# Altium PCB E17-02-003.PcbDoc
Units mil, origin at the board's own origin, x right, y up, seen from the top; angles counter-clockwise.
Board outline 5413.39 x 3530 mil, 2 copper layers (Top Layer, Bottom Layer); 74 components, 64 nets, 364 pads, 0 vias.
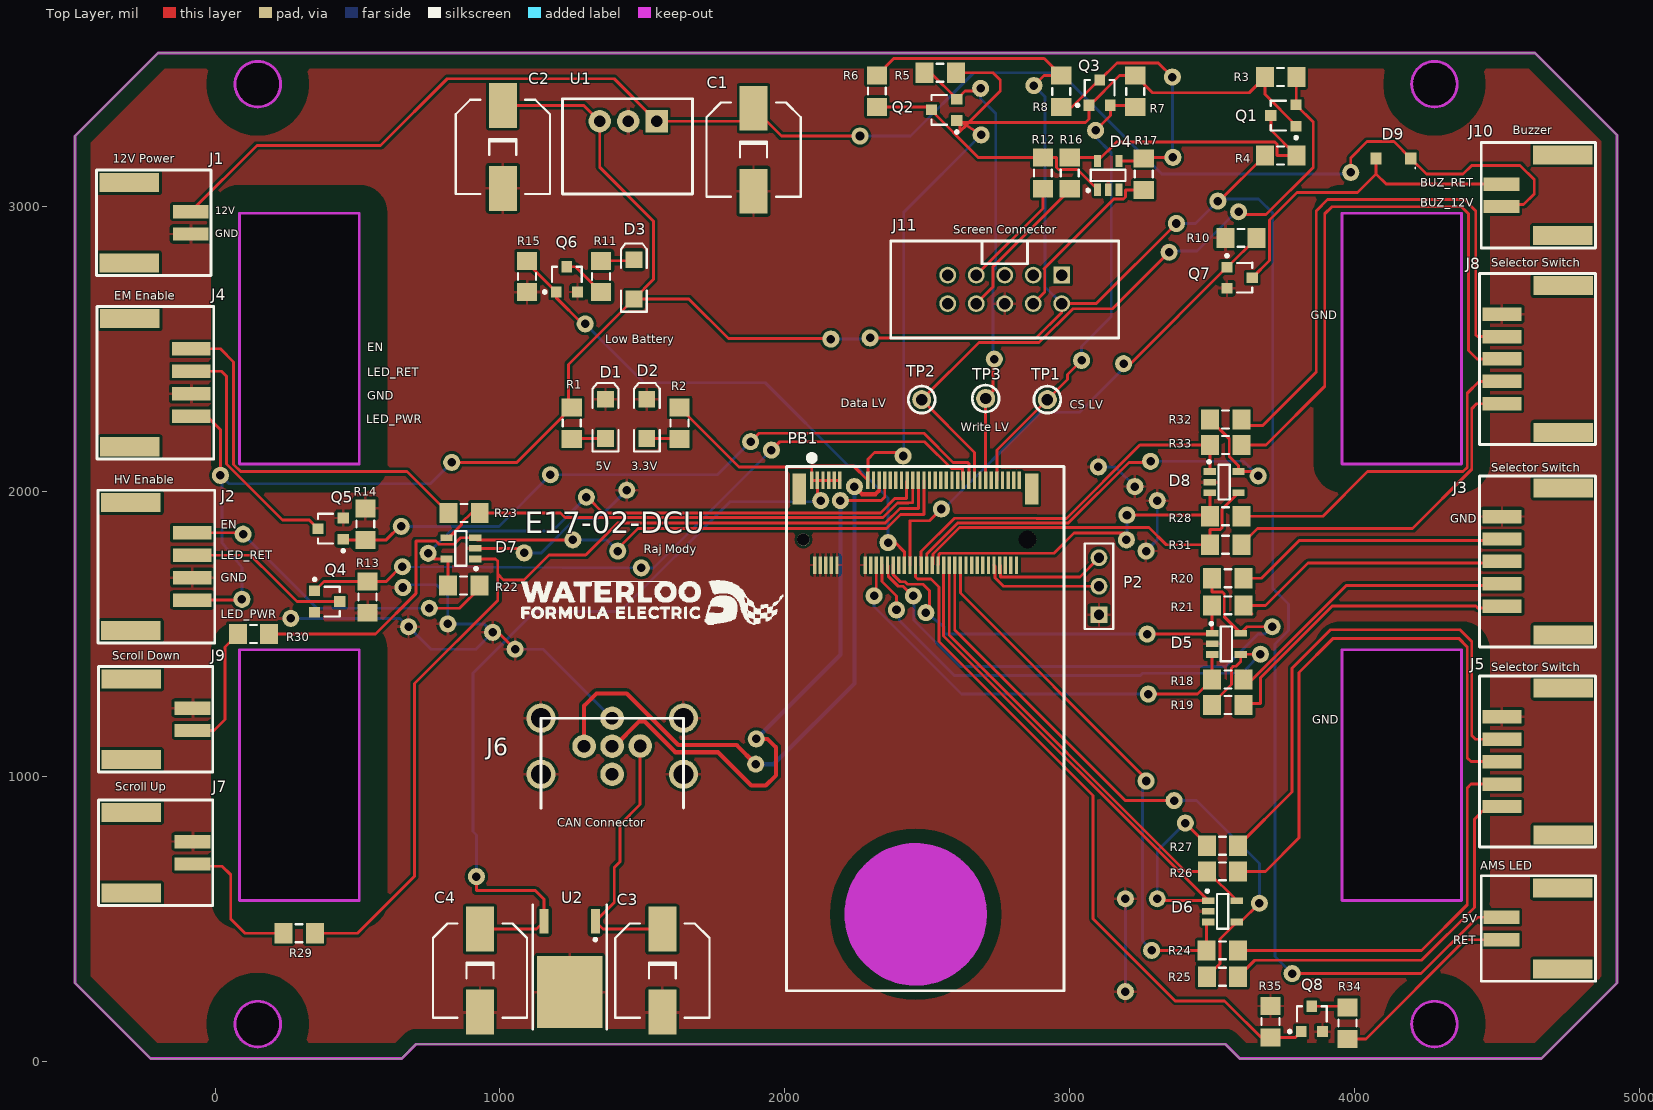
[diagram p0: Top Layer view]
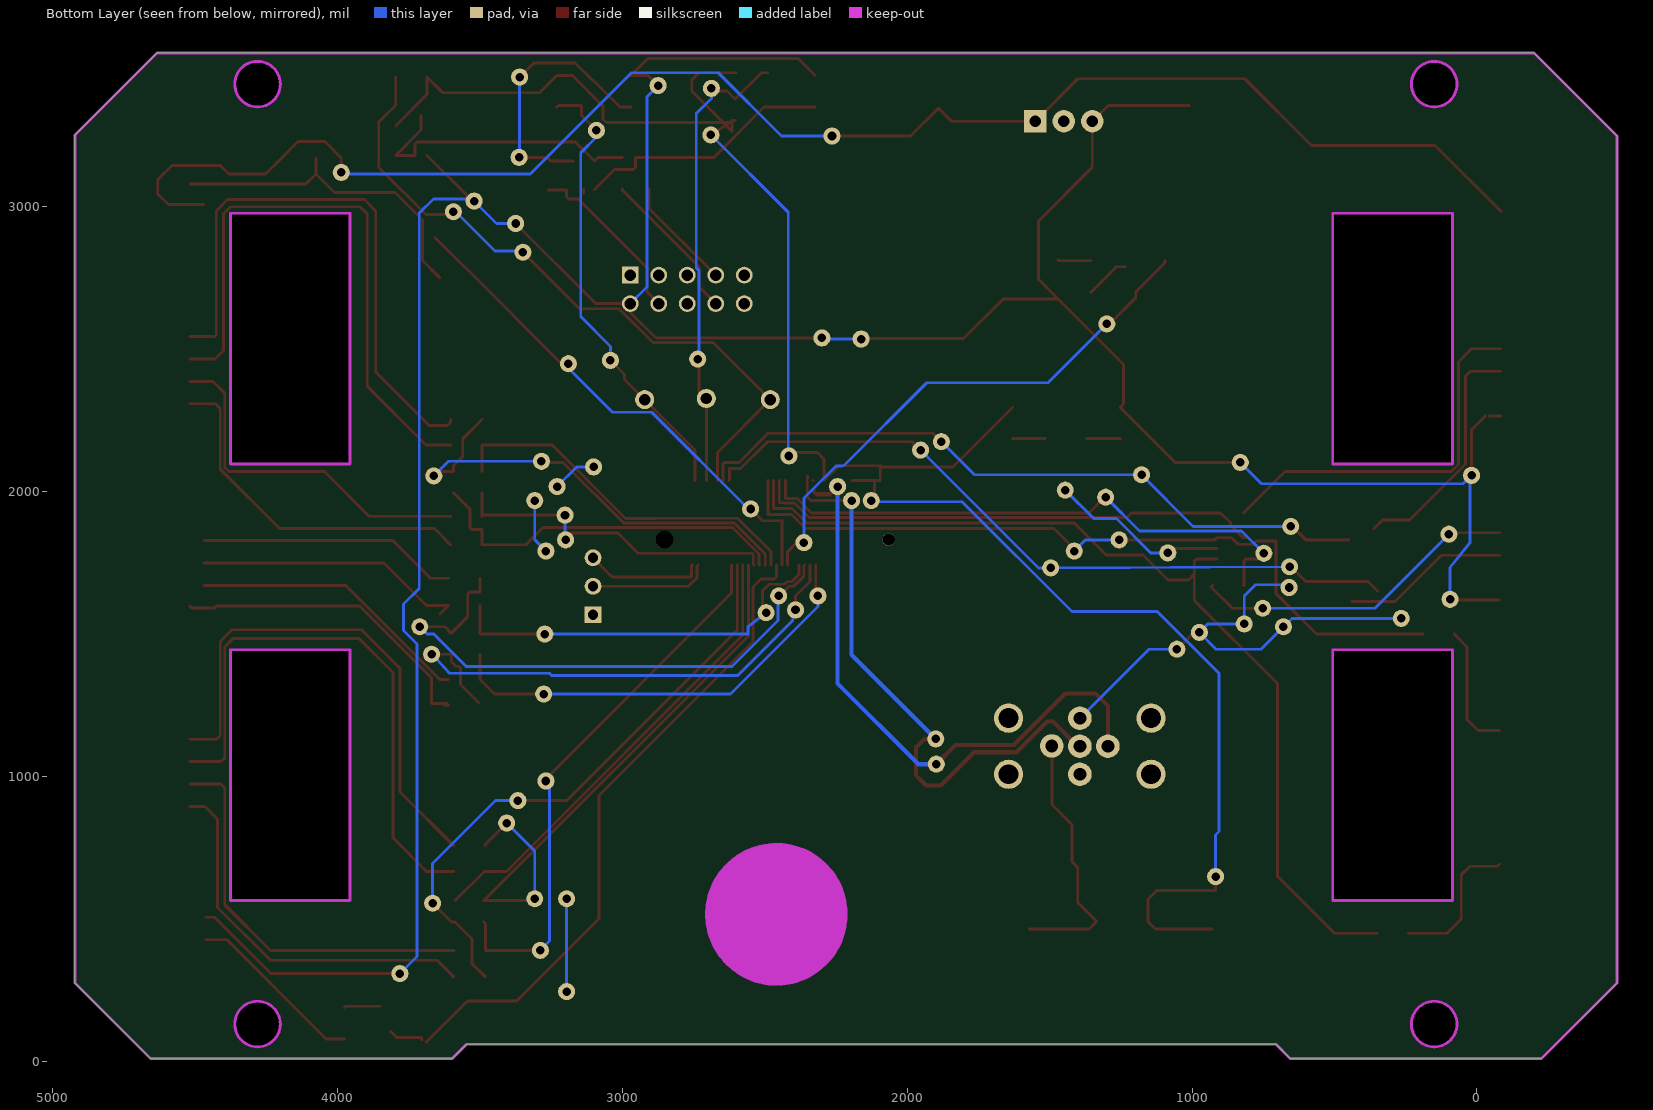
[diagram p1: Bottom Layer view, seen from below]
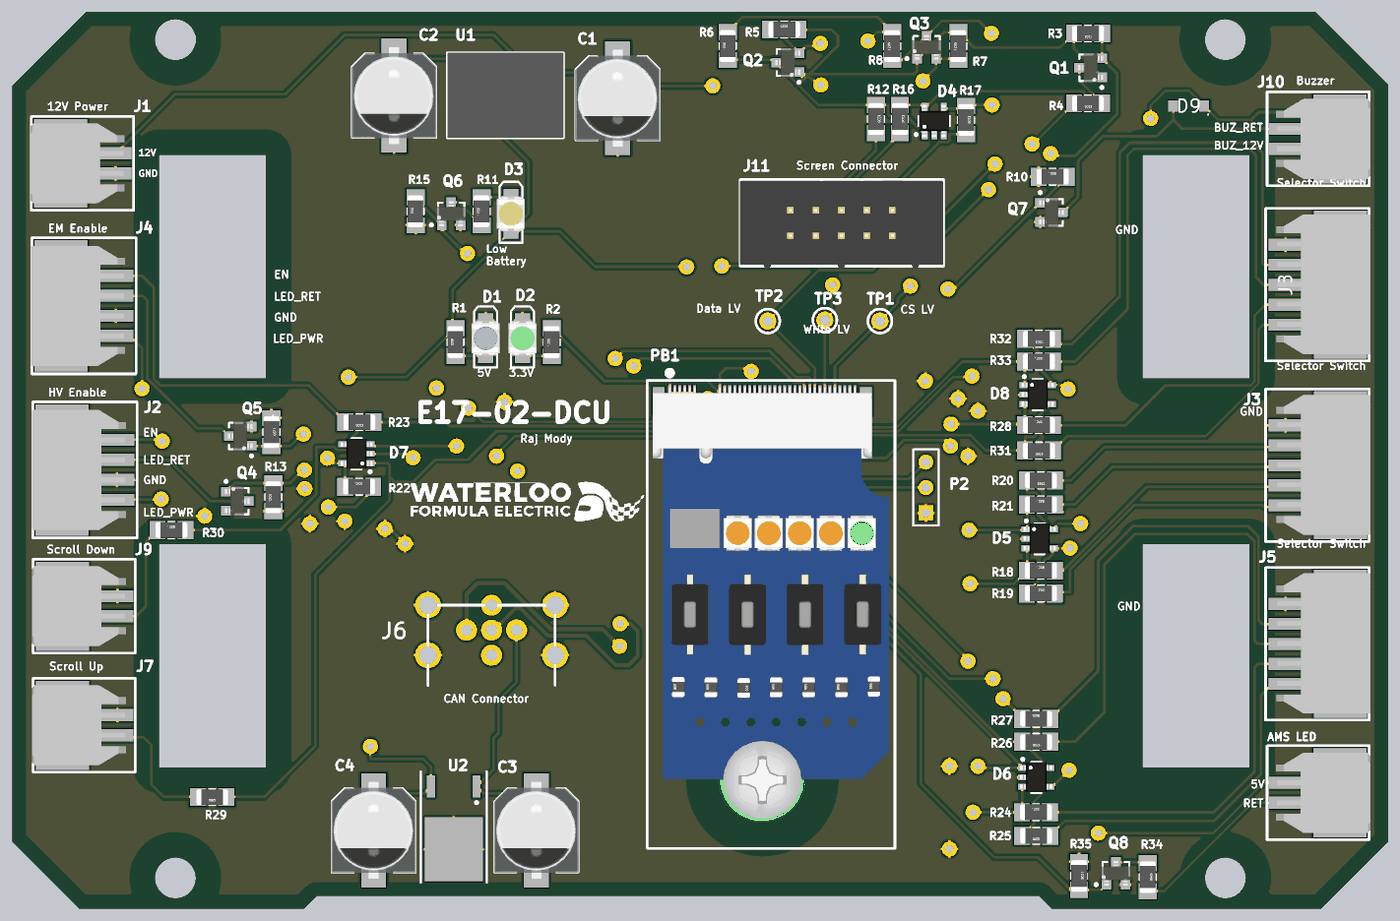
[diagram p2: 3D render of the assembled board from above, using the file's embedded part models]

## Layer stack, top to bottom
Top Solder: solder mask 0.4, Solder Resist, Dk 3.5
Top Layer: signal copper 1.4
Dielectric 1: dielectric 12.6, FR-4, Dk 4.8
Bottom Layer: signal copper 1.4
Bottom Solder: solder mask 0.4, Solder Resist, Dk 3.5

## Board outline
-226.54,10 -492.13,275.59 -492.13,3248.03 -200.16,3540 4633.23,3540 4921.26,3251.97 4921.26,275.59 4655.67,10 3596.3,10 3546.3,60 705.67,60 655.67,10
cut-out: 3955,565 3955,1445 4375,1445 4375,565
cut-out: 3955,2097 3955,2977 4375,2977 4375,2097
cut-out: 86,565 86,1445 506,1445 506,565
cut-out: 86,2097 86,2977 506,2977 506,2097
cut-out: 70,131 ccw(c150,131) 150,51 ccw(c150,131) 230,131 ccw(c150,131) 150,211 ccw(c150,131)
cut-out: 150,3350 cw(c150,3430) 70,3430 cw(c150,3430) 150,3510 cw(c150,3430) 230,3430 cw(c150,3430)
cut-out: 4200,3430 ccw(c4280,3430) 4280,3350 ccw(c4280,3430) 4360,3430 ccw(c4280,3430) 4280,3510 ccw(c4280,3430)
cut-out: 4200,131 ccw(c4280,131) 4280,51 ccw(c4280,131) 4360,131 ccw(c4280,131) 4280,211 ccw(c4280,131)

## Design rules (kind name [scope] priority, off if disabled: settings)
BoardOutlineClearance [InPolygon] p1: gap=10 ignorepadtopadclearanceinfootprint=FALSE except(0: Arc-SplitContinuation Track-SplitContinuation SMDPad-SplitContinuation THPad-SplitContinuation Via-SplitContinuation Fill-SplitContinuation Poly-SplitContinuation Region-SplitContinuation Text-SplitContinuation; 100: Poly-OutlineEdge Poly-CavityEdge Poly-CutoutEdge Poly-SplitBarrior)
Clearance Clearance_3 [InPolygon vs OnLayer('Top Layer')] p1: gap=10 ignorepadtopadclearanceinfootprint=FALSE
Clearance Clearance_4 [InPolygon vs IsPad] p2: gap=10 ignorepadtopadclearanceinfootprint=FALSE
Clearance Clearance_5 [OnLayer('Top Layer') vs IsPad] p3: gap=6 ignorepadtopadclearanceinfootprint=FALSE
Clearance Clearance_6 [OnLayer('Bottom Layer') vs IsPad] p4: gap=6 ignorepadtopadclearanceinfootprint=FALSE
Clearance Clearance_2 [OnLayer('Bottom Layer') vs OnLayer('Bottom Layer')] p5: gap=6 ignorepadtopadclearanceinfootprint=FALSE
Clearance Clearance_1 [InPolygon vs OnLayer('Keep-Out Layer')] p6: gap=50 ignorepadtopadclearanceinfootprint=FALSE
Clearance [OnLayer('Top Layer') vs OnLayer('Top Layer')] p7: gap=6 ignorepadtopadclearanceinfootprint=FALSE
DiffPairsRouting [All] p1: maxlimit=10 minlimit=10 mostfreqgap=10 toplayer_minwidth=15 toplayer_maxwidth=15 toplayer_prefwidth=15 bottomlayer_minwidth=15 bottomlayer_maxwidth=15 bottomlayer_prefwidth=15 maxuncoupledlength=500
PlaneClearance [All] p1: clearance=40
PolygonConnect [All] p1: connectstyle=Relief reliefconductorwidth=10 reliefentries=4 polygonreliefangle="90 Angle" airgapwidth=10
RoutingVias [All] p1: holewidth=28 width=50 viastyle="Through Hole" minholewidth=28 minwidth=50 maxholewidth=28 maxwidth=50
SolderMaskExpansion [All] p1: expansion=4
Width [All] p1: maxlimit=10 minlimit=1 preferedwidth=10
28 further rules are at their usual default settings.

## Classes and differential pairs
component class E16-02-001: C1 C2 C3 C4 D1 D2 D9 J10 PB1 Q1 Q2 Q3 Q7 R1 R2 R3 R4 R5 R6 R7 R8 R10 TP1 TP2 TP3 U1 U2
component class E16-02-002: "AMS LED" D3 D4 D5 D6 D7 D8 J1 J2 J3 J4 J5 J6 J7 J8 J9 J11 P2 Q4 Q5 Q6 Q8 R11 R12 R13 R14 R15 R16 R17 R18 R19 R20 R21 R22 R23 R24 R25 R26 R27 R28 R29 R30 R31 R32 R33 R34 R35
differential pair CAN: +CAN_P -CAN_N

## Components (designator, comment, footprint, x,y, rotation, side; value= is the part's Value field where it differs from the comment)
"AMS LED" "J_5023520200" MOLEX_DURACLIK_2 4515,466.54 r270 top (schematic designator J12)
C1 "UWT1E470MCL1GB" UWT1E470MCL1GB 1890,3200 r270 top
C2 "UWT1E470MCL1GB" UWT1E470MCL1GB 1010,3210 r270 top
C3 "UWT1E470MCL1GB" UWT1E470MCL1GB 1569.96,318.62 r270 top
C4 "UWT1E470MCL1GB" UWT1E470MCL1GB 929.96,318.62 r270 top
D1 "OVS5MBBCR4" OVS5MBBCR4 1370.43,2254.92 r90 top
D2 "OVS5MGBCR4" OVS5MGBCR4 1515.43,2254.92 r90 top
D3 "OVS5MRBCR4" OVS5MRBCR4 1470,2745 r90 top
D4 "RCLAMP3354S.TCT" SOT95P280X145-5N 3135,3110 r90 top
D5 "RCLAMP3354S.TCT" SOT95P280X145-5N 3549.76,1465.63 r0 top
D6 "RCLAMP3354S.TCT" SOT95P280X145-5N 3536.14,526.97 r0 top
D7 "RCLAMP3354S.TCT" SOT95P280X145-5N 862.8,1800.75 r180 top
D8 "RCLAMP3354S.TCT" SOT95P280X145-5N 3541.89,2033.27 r0 top
D9 "General Purpose Diode" SODFL350X110-2N 4135.83,3169.29 r180 top
J1 "J_5023520200" MOLEX_DURACLIK_2 -85.32,2943.54 r90 top
J2 "WM7171CT-ND" MOLEX_DURACLIK_4 -79.53,1736.81 r90 top
J3 "WM7171CT-ND" MOLEX_DURACLIK_5 4516.97,1754.92 r270 top
J4 "WM7171CT-ND" MOLEX_DURACLIK_4 -83.46,2382.48 r90 top
J5 "WM7171CT-ND" MOLEX_DURACLIK_5 4516.97,1052.17 r270 top
J6 "CAN Connector (Straight)" "CAN Connector (Straight)" 1393.7,1106.3 r0 top
J7 "J_5023520200" MOLEX_DURACLIK_2 -78.74,732.28 r90 top
J8 "WM7171CT-ND" MOLEX_DURACLIK_5 4516.97,2465.55 r270 top
J9 "J_5023520200" MOLEX_DURACLIK_2 -78.74,1200.79 r90 top
J10 "J_5023520200" MOLEX_DURACLIK_2 4515,3040 r270 top
J11 "3020-10-0100-00" "IDC 10 Pos" 2971.65,2759.84 r180 top
P2 "Header 3" HDR1X3 3102.36,1567.72 r90 top
PB1 "ProcBoardRev2" PROC_BOARD 2094.49,1350.39 r0 top
Q1 "N-Channel MOSFET SOT23-3" SOT23-3 3750,3320 r90 top
Q2 "N-Channel MOSFET SOT23-3" SOT23-3 2559.29,3340 r90 top
Q3 "N-Channel MOSFET SOT23-3" SOT23-3 3105,3400 r0 top
Q4 "2N7002P,215" SOT23-3 393.7,1614.17 r270 top
Q5 "2N7002P,215" SOT23-3 405.51,1870.08 r90 top
Q6 "2N7002P,215" SOT23-3 1235,2745 r0 top
Q7 "N-Channel MOSFET SOT23-3" SOT23-3 3596.02,2750.55 r270 top
Q8 "2N7002P,215" SOT23-3 3849.65,149.17 r0 top
R1 "Res" 3216[1206] 1251.97,2240.16 r90 top
R2 "Res" 3216[1206] 1630.43,2240.04 r90 top
R3 "Res" 3216[1206] 3740,3455 r180 top
R4 "Res" 3216[1206] 3739.88,3180 r180 top
R5 "Res" 3216[1206] 2545,3470 r0 top
R6 "Res" 3216[1206] 2322.83,3405.51 r90 top
R7 "Res" 3216[1206] 3230,3405 r90 top
R8 "Res" 3216[1206] 2970,3405 r90 top
R10 "Res" 3216[1206] 3601.02,2890.55 r0 top
R11 "Res" 3216[1206] 1355,2755 r90 top
R12 "Res" 3216[1206] 2905.51,3118.11 r270 top
R13 "Res" 3216[1206] 535.43,1629.92 r90 top
R14 "Res" 3216[1206] 527.56,1885.83 r270 top
R15 "Res" 3216[1206] 1095,2755 r90 top
R16 "Res" 3216[1206] 3000,3118.11 r270 top
R17 "Res" 3216[1206] 3259.84,3114.17 r270 top
R18 "Res" 3216[1206] 3554.76,1340.63 r0 top
R19 "Res" 3216[1206] 3554.76,1250.63 r0 top
R20 "Res" 3216[1206] 3554.76,1695.63 r180 top
R21 "Res" 3216[1206] 3554.76,1600.63 r0 top
R22 "Res" 3216[1206] 872.8,1670.75 r0 top
R23 "Res" 3216[1206] 874.02,1925.2 r180 top
R24 "Res" 3216[1206] 3535.43,389.76 r0 top
R25 "Res" 3216[1206] 3536.02,296.97 r180 top
R26 "Res" 3216[1206] 3536.02,666.97 r180 top
R27 "Res" 3216[1206] 3536.02,756.97 r0 top
R28 "Res" 3216[1206] 3547.01,1913.27 r0 top
R29 "Res" 3216[1206] 295,450 r180 top
R30 "Res" 3216[1206] 135,1500 r0 top
R31 "Res" 3216[1206] 3547.01,1813.27 r180 top
R32 "Res" 3216[1206] 3546.89,2253.27 r180 top
R33 "Res" 3216[1206] 3546.89,2163.27 r0 top
R34 "Res" 3216[1206] 3974.65,134.29 r270 top
R35 "Res" 3216[1206] 3704.65,139.29 r270 top
TP1 "Test Point" "TEST POINT 5000K" 2921.26,2322.83 r0 top
TP2 "Test Point" "TEST POINT 5000K" 2480.32,2322.83 r0 top
TP3 "Test Point" "TEST POINT 5000K" 2704.72,2326.77 r0 top
U1 "R-78E5.0-1.0" R-78E5.0-1.0 1550,3300 r180 top
U2 "UA78M33CKVURG3" TO-252-3 1244.96,117.64 r180 top

## Footprints (in the part's own frame and the unit in brackets; to place one, negate y for a bottom-side part, rotate by r counter-clockwise, add the part's x,y. Pads: shape width x height; smd on the part's side, far side on the other; paste and mask are expansions set on the pad)
3216[1206] [mm] "Chip Resistor; Body 3.2 x 1.6 mm (LxW typ)"
  rect 1.6x1.8 smd: 1(-1.4,0) 2(1.4,0)
  silkscreen extent -0.3,-0.8 0.3,0.8, body extent -1.6,-0.79 1.6,0.81, height 1
"CAN Connector (Straight)" [mm] "Straight Configuration"
  round 2.1 hole 1.14: 1(0,-2.5) 2(2.5,0.025) 3(0,2.5) 4(-2.5,0) 5(0,0)
  round 2.6 hole 1.78: 6(-6.35,-2.5) 7(-6.35,2.5) 8(6.35,-2.5) 9(6.35,2.5)
  silkscreen extent -6.35,-5.52 6.35,2.5, body extent -10.28,-12.59 10.28,9.95, height 24.5
HDR1X3 [mm] "Connector; Header; 3 Position"
  rect 1.5x1.5 hole 0.9: 1(0,0)
  round 1.5 hole 0.9: 2(2.54,0) 3(5.08,0)
  silkscreen extent -1.27,-1.27 6.35,1.27
"IDC 10 Pos" [mm] "10 Position (5x2) IDC Connector"
  rect 1.5x1.5 hole 1.02: 1(0,0)
  round 1.5 hole 1.02: 2(0,2.54) 3(2.54,0) 4(2.54,2.54) 5(5.08,0) 6(5.08,2.54) 7(7.62,0) 8(7.62,2.54) 9(10.16,0) 10(10.16,2.54)
  silkscreen extent -5.08,-3.05 15.24,5.61, body extent -5.02,-2.95 15.28,5.87, height 8.89
MOLEX_DURACLIK_2 [mm] "2 Positions Header, Shrouded Connector 0.079\" (2.00mm) Surface Mount, Right Angle Tin"
  rect 1.7x5.3 smd: 0(-3.6,5.48) 0(3.6,5.48)
  rect 1.2x3.2 smd: 1(-1,0) 2(1,0)
  silkscreen extent -4.7,-1.8 4.7,8.4, body extent -4,-0.89 4,8.51, height 6.38
MOLEX_DURACLIK_4 [mm]
  rect 1.7x5.3 smd: 0(-5.715,5.48) 0(5.715,5.48)
  rect 1.2x3.45 smd: 1(-2.984,0) 2(-0.984,0) 3(1.016,0) 4(3.016,0)
  silkscreen extent -6.8,-2 6.8,8.4, body extent -6,-0.9 6,8.5, height 6.41
MOLEX_DURACLIK_5 [mm] "DuraClik™ Wire-to-Board Header, Single Row, Right Angle, 5 Circuits, Tin (Sn) Plating, Black"
  rect 1.7x5.3 smd: 0(-6.55,5.48) 0(6.55,5.48)
  rect 1.2x3.45 smd: 1(-4,0) 2(-2,0) 3(0,0) 4(2,0) 5(4,0)
  silkscreen extent -7.63,-2 7.63,8.35, body extent -7.05,-0.92 6.95,8.47, height 6.41
OVS5MBBCR4 [mm] "SMT LED; 2 Flat Leads; BLUE"
  rect 1.5x1.5 smd: 1(-1.75,0) 2(1.75,0)
  silkscreen extent -2.9,-1.15 3.2,1.15, body extent -1.75,-1.4 1.75,1.4, height 1.6
OVS5MGBCR4 [mm] "SMT LED; 2 Flat Leads; GREEN"
  rect 1.5x1.5 smd: 1(-1.75,0) 2(1.75,0)
  silkscreen extent -2.9,-1.15 3.2,1.15, body extent -1.75,-1.4 1.75,1.4, height 1.6
OVS5MRBCR4 [mm] "SMT LED; 2 Flat Leads; RED"
  rect 1.5x1.5 smd: 1(-1.75,0) 2(1.75,0)
  silkscreen extent -2.9,-1.15 3.2,1.15, body extent -1.75,-1.4 1.75,1.4, height 1.6
PROC_BOARD [mm]
  rect 1.2x2.75 smd: 0(-1.1,16.725) 0(19.6,16.725)
  round 1.1 hole 1.1 unplated paste+0: 0(-0.75,12.225)
  round 0 hole 6.35 unplated: 0(9.258,-21.183)
  round 1.524 hole 1.6 unplated: 0(19.25,12.225)
  rect 0.3x1.55 smd: 1(0,17.5) 2(0.25,9.95) 3(0.5,17.5) 4(0.75,9.95) 5(1,17.5) 6(1.25,9.95) 7(1.5,17.5) 8(1.75,9.95) 9(2,17.5) 10(2.25,9.95) 11(2.5,17.5) 12(4.75,9.95) 13(5,17.5) 14(5.25,9.95) 15(5.5,17.5) 16(5.75,9.95) 17(6,17.5) 18(6.25,9.95) 19(6.5,17.5) 20(6.75,9.95) 21(7,17.5) 22(7.25,9.95) 23(7.5,17.5) 24(7.75,9.95) 25(8,17.5) 26(8.25,9.95) 27(8.5,17.5) 28(8.75,9.95) 29(9,17.5) 30(9.25,9.95) 31(9.5,17.5) 32(9.75,9.95) 33(10,17.5) 34(10.25,9.95) 35(10.5,17.5) 36(10.75,9.95) 37(11,17.5) 38(11.25,9.95) 39(11.5,17.5) 40(11.75,9.95) 41(12,17.5) 42(12.25,9.95) 43(12.5,17.5) 44(12.75,9.95) 45(13,17.5) 46(13.25,9.95) 47(13.5,17.5) 48(13.75,9.95) 49(14,17.5) 50(14.25,9.95) 51(14.5,17.5) 52(14.75,9.95) 53(15,17.5) 54(15.25,9.95) 55(15.5,17.5) 56(15.75,9.95) 57(16,17.5) 58(16.25,9.95) 59(16.5,17.5) 60(16.75,9.95) 61(17,17.5) 62(17.25,9.95) 63(17.5,17.5) 64(17.75,9.95) 65(18,17.5) 66(18.25,9.95) 67(18.5,17.5)
  Keep-Out Layer circle w6.35: c9.258,-21.183 r3.175
  silkscreen extent -2.25,-28 22.5,19.75, body extent -1.7,-25.44 21.89,18.08, height 6.34
R-78E5.0-1.0 [mm] "Recom Power 28V to 5V"
  rect 2x2 hole 1 mask+0.102: 1(0,0)
  round 2 hole 1 mask+0.102: 2(2.54,0) 3(5.08,0)
  silkscreen extent -3.21,-2 8.39,6.5, body extent -3.21,-2.03 8.39,6.47, height 3.61
SODFL350X110-2N [mm] "SODFL, 2-Leads, Body 1.70x3.50mm, IPC Medium Density"
  rect 1x1.1 smd: 1(-1.55,0) 2(1.55,0)
  silkscreen extent -2,0.8 -1.9,0.9, body extent -1.4,-0.95 1.4,0.95, height 1.1
SOT23-3 [mm] "SOT-23; 3 Leads; Body 3.0 x 2.5 mm, inc. leads (LxW max)"
  rect 0.95x1 smd: 1(-0.95,-1.125) 2(0.95,-1.125) 3(0,1.125)
  silkscreen extent -2.1,-1.25 1.32,1.13, body extent -1.52,-1.24 1.52,1.24, height 1.17
SOT95P280X145-5N [mm] "SOT23, 5-Leads, Body 2.95x2.80mm, Pitch 0.95mm, IPC Medium Density"
  rect 1.1x0.6 smd: 1(-1.275,0.95) 2(-1.275,0) 3(-1.275,-0.95) 4(1.275,-0.95) 5(1.275,0.95)
  silkscreen extent -1.47,-1.55 0.5,1.92, body extent -1.6,-1.48 1.6,1.52, height 0.91
"TEST POINT 5000K" [mm] "Test Point, 5000 Keystone Series, 0.040\" Hole"
  round 1.7 hole 1.02 mask+0.1: 1(0,0)
  silkscreen extent -1.2,-1.2 1.2,1.2
TO-252-3 [mm] "D-PAK/TO-252-3; 3 Leads"
  rect 0.8x2.2 smd: 1(-2.28,-9.5) 3(2.28,-9.5)
  rect 5.8x6.4 smd: 2(0,-3.2)
  silkscreen extent -3.3,-11 3.3,0.13
UWT1E470MCL1GB [mm] "CAP ALUM 47UF 25V 20% SMD"
  rect 4x2.5 smd: 1(-3.7,0) 2(3.7,0)
  silkscreen extent -4.2,-4.2 4.2,4.2, body extent -4.85,-4.25 4.85,4.25, height 10.5

## Part data
"AMS LED" J1 J7 J9 J10: "MOLEX DURACLIK 2-PIN RA"
C1 C2 C3 C4: "CAP ALUM 47UF 25V 20% SMD"
D1: "Typical BLUE LED"
D2: "Typical GREEN LED"
D3: "Typical RED LED"
D4 D5 D6 D7 D8: "TVS DIODE 3.3VWM 16VC"
J2 J4: library part J_5023520400, "MOLEX DURACLIK 4-PIN RA"
J3 J5 J8: library part J_5023520500, "MOLEX DURACLIK 5-PIN RA"
J11: library part IDC_10Pos
P2: "Header, 3-Pin"
PB1: "Processor board that carries the STM32F072RB"
Q1 Q2 Q3 Q7: library part "MOSFET-N SOT23-3"
Q4 Q5 Q6 Q8: "N-Channel Enhancement Mode Vertical DMOS FET"
R1 R2 R3 R4 R5 R6 R7 R8 R10 R11 R12 R13 R14 R15 R16 R17 R18 R19 R20 R21 R22 R23 R24 R25 R26 R27 R28 R29 R30 R31 R32 R33 R34 R35: "Surface Mount Resistor"
TP1 TP2 TP3: "5000-5004, 5015-5019 Keystone Electronics"
U1: "Recom Power 28V to 5V"
U2: "3.3V Regulator"

## Free pads (board coordinates)
  round 60 hole 30: 2(657.48,1736.22) 3(1496.06,1732.28) 4(653.54,1877.95) 5(1177.17,2059.06) 6(98.43,1850.39) 7(19,2057) 7(94.49,1622.05) 7(265.75,1555.12) 7(659.45,1663.39) 7(679.13,1525.59) 7(751.97,1590.55) 7(816.93,1535.43) 7(974.41,1505.91) 7(1053.15,1446.85) 7(2687.01,3415.35) 7(2688.98,3251.97) 7(2874.02,3425.2) 7(3090.55,3267.72) 7(3348.54,2840.12) 7(3592.52,2982.28) 7(3986.22,3120.08) 8(830.71,2102.36) 10(2263.78,3248.03) 12(3519.69,3019.68) 13(917.32,648.86) 13(1299.21,2588.58) 13(1879.92,2175.2) 13(1897.64,1043.31) 13(1899.61,1131.89) 13(1952.76,2145.67) 13(2125.98,1968.5) 13(2161.42,2535.43) 13(2194.88,1968.5) 13(2244.09,2017.72) 13(2299.21,2539.37) 13(2312.99,1633.86) 13(2362.2,1820.87) 13(2391.73,1584.65) 13(2415,2125) 13(2450.79,1633.86) 13(2495,1575) 13(2549.21,1938.98) 13(2735,2465) 13(3041.34,2460.63) 13(3100.39,2086.61) 13(3188.98,2448.82) 13(3198.82,1830.71) 13(3200.79,1917.32) 13(3228.35,2017.72) 13(3267.72,1791.34) 13(3271.65,1500) 13(3275.59,1289.37) 13(3283.46,2106.3) 13(3307.09,570.87) 13(3307.09,1968.5) 13(3374.02,2940.94) 13(3405.51,836.61) 13(3661.42,2055.12) 13(3669.29,1429.13) 13(3710.63,1525.59) 14(3360,3455) 15(3362.2,3173.23) 16(1413.39,1791.34) 17(1255.91,1830.71) 18(1303.15,1980.32) 19(748.03,1783.46) 20(3267.72,984.25) 21(3287.4,389.76) 21(3780.51,308.07) 22(3366.14,915.35) 23(3665.35,555.12) 26(3195,570.87) 27(3195,245) 28(1085,1785) 29(1445,2005)

## Nets (pads, with @x,y where several pads share a name; then routed paths per layer and width w, separated by ;. In a path a pad name is that pad's centre, name@x,y a point inside that pad or via, vN(x,y) a via of type N, cw(c..) or ccw(c..) an arc to the next point about the centre after c; other vN are vias at no path point)
3_3V: C4.1 pad.7@2688.98,3251.97 pad.13@917.32,648.86 pad.13@2125.98,1968.5 pad.13@2415,2125 PB1.1 PB1.3 PB1.5 PB1.7 PB1.9 PB1.11 PB1.13 Q1.1 Q2.1 Q3.1 R2.2 R3.2 R5.2 R7.2 U2.3 | length 7234.1
  Top Layer w10: pad.13@917.32,648.86 917.32,599.65 1124.02,599.65 1155.2,568.46 U2.3 1127.83,464.29 C4.1 ; R2.2 1838.98,2086.61 2090.55,2086.61 2094.49,2090.55 ; pad.13@2102.36,1964.57 2114.17,1976.38 PB1.3 ; PB1.11 PB1.9 PB1.7 PB1.5 PB1.3 ; PB1.13 PB1.13@2291.34,2040.76 ; PB1.13@2292.73,2040.76 PB1.13@2291.34,2040.76 ; pad.13@2415.83,2137.32 2315,2137.32 2291.34,2113.66 PB1.13@2291.34,2040.76 ; R5.2 2730.79,3470 2755.91,3444.88 2755.91,3405.51 2645.67,3295.28 ; Q2.1 Q2.1@2613.62,3302.6 ; pad.7@2688.98,3251.97 2636.39,3286 ; Q1.1 3794.29,3285.36 3684.88,3394.77 R3.2 3629.88,3400 3290.12,3400 R7.2 3174.77,3460.12 3070.36,3355.71 Q3.1 3067.6,3307.76 3055.12,3295.28 2645.67,3295.28 ; 2094.49,2090.55 PB1.1 PB1.3 ; 2094.49,2090.55 2240.16,2090.55 2289.95,2040.76 PB1.13@2291.34,2040.76 ; Q2.1@2622.05,3295.28 2614.72,3302.6 2614.72,3264.33 2636.39,3286 ; Q2.1@2622.05,3295.28 2636.39,3286 ; Q2.1@2622.05,3295.28 2645.67,3295.28 ; 2636.39,3286 2645.67,3295.28
  Bottom Layer w10: pad.13@917.32,633.86 917.32,648.86 917.32,795.28 905.51,807.09 905.51,1362.2 1122.05,1578.74 1421.26,1578.74 1807.09,1964.57 pad.13@2125.98,1964.57 ; pad.13@2415,2125 2417.32,2127.32 2417.32,2980.31 pad.7@2688.98,3251.97
5V: "AMS LED.1" C2.1 D3.1 J2.1 J4.1 J11.2 pad.7@19,2057 pad.7@94.49,1622.05 pad.7@2874.02,3425.2 pad.8 pad.12 pad.13@2161.42,2535.43 pad.13@2299.21,2539.37 pad.13@3374.02,2940.94 pad.21@3780.51,308.07 R1.2 R4.2 R6.2 R8.2 U1.3 | length 11719.2
  Top Layer w10: J4.1 J4.1@-44.53,2265 ; J2.1 83.9,1619.33 pad.7@94.49,1622.05 ; J4.1@-29,2265 19,2217 pad.7@19,2057 ; pad.8 1059.06,2102.36 R1.2 1240.16,2307.09 1240.16,2446.26 D3.1 ; C2.1 1294.33,3355.67 U1.3 1350,3138.19 1539.37,2948.82 1539.37,2745.47 D3.1 ; pad.13@2161.42,2535.43 2159.04,2536.99 1801.59,2536.99 1662.48,2676.1 D3.1 ; pad.13@2299.21,2539.37 2881.89,2539.37 2971.65,2629.13 J11.2 3092.91,2659.84 pad.13@3374.02,2940.94 ; R6.2 2382.2,3520 2910.12,3520 R8.2 2908.94,3460.12 pad.7@2874.02,3425.2 ; pad.12 3524.45,3019.68 R4.2 ; pad.21@3780.51,308.07 4233.07,308.07 4430.91,505.91 4460.63,505.91
  Bottom Layer w10: pad.7@94.49,1622.05 94.49,1733.27 25,1820.13 25,2039.08 19,2057 48.44,2027.56 755.91,2027.56 pad.8 ; pad.13@2161.42,2535.43 2295.28,2535.43 pad.13@2299.21,2539.37 ; pad.7@2874.02,3425.2 2913.39,3385.83 2913.39,2718.11 J11.2 ; pad.13@3374.02,2940.94 3440.94,2940.94 pad.12 3527.56,3027.56 3662.44,3027.56 3712.6,2977.4 3712.6,1660.43 3767.72,1605.32 3767.72,1512.8 3720,1465.08 3720,368.58 pad.21@3780.51,308.07
12V: C1.1 D9.1 J1.2 J10.2 pad.7@3986.22,3120.08 pad.10 U1.1 | length 5636.5
  Top Layer w10: J1.2 146.77,3215 581.14,3215 814.96,3448.82 1401.18,3448.82 U1.1 1844.33,3300 C1.1 1987.64,3248.03 pad.10 ; pad.7@3986.22,3120.08 3986.22,3171.22 4043.35,3228.35 4137.8,3228.35 D9.1 4251.97,3114.17 4379.92,3114.17 4410.75,3145 4580,3145 4630,3095 4630,3045 4592.87,3007.87 J10.2@4469.29,3007.87
  Bottom Layer w10: pad.10 2440.94,3248.03 2662.91,3470 2967.01,3470 3322.83,3114.17 pad.7@3972.44,3114.17
AMS_LED: PB1.30 Q8.1 R35.2 | length 2436.6
  Top Layer w10: PB1.30 2458.66,1699.8 2465.3,1693.17 2512.53,1693.17 2541.09,1664.61 2541.09,1473.68 3081.69,933.07 3081.69,500.98 3370.08,212.6 3543.35,212.6 R35.2@3687.97,67.97 ; R35.2@3704.65,76.3 R35.2 3791.54,84.17 Q8.1
BRIGHT_POS1: D6.3 pad.20 pad.21@3287.4,389.76 PB1.46 R24.1 | length 1936
  Top Layer w10: PB1.46 2616.14,1643.7 3267.72,992.12 pad.20 ; pad.21@3287.4,389.76 R24.1 3480.31,483.94 D6.3
  Bottom Layer w10: pad.20 3255,971.54 3255,422.17 pad.21@3287.4,389.76
BRIGHT_POS2: D6.4 pad.22 pad.23 PB1.44 R25.2 | length 2118.6
  Top Layer w10: PB1.44 2596.46,1513.78 3194.88,915.35 pad.22 ; R25.2 3526.81,342.87 3526.81,430.04 D6.4 3599.8,489.57 pad.23
  Bottom Layer w10: pad.22 3444.88,915.35 3665.35,694.88 pad.23
BRIGHT_POS3: D6.5 PB1.42 R26.2 | length 1641.5
  Top Layer w10: PB1.42 2576.77,1496.17 3405.97,666.97 R26.2 3483.74,666.97 D6.5
BRIGHT_POS4: D6.1 pad.13@3307.09,570.87 pad.13@3405.51,836.61 PB1.40 R27.1 | length 2161.4
  Top Layer w10: PB1.40 2557.09,1493.23 D6.1 3313.58,564.37 pad.13@3307.09,570.87 ; pad.13@3405.51,836.61 3480.91,761.22 R27.1
  Bottom Layer w10: pad.13@3307.09,570.87 3307.09,738.19 pad.13@3405.51,836.61
BUZZER: pad.13@2549.21,1938.98 pad.13@3188.98,2448.82 PB1.28 Q7.1 R10.2 | length 1790.5
  Top Layer w10: PB1.28 2438.98,1897.64 2507.87,1897.64 pad.13@2549.21,1938.98 ; pad.13@3188.98,2448.82 3212.6,2448.82 Q7.1 3553.54,2787.95 R10.2
  Bottom Layer w10: pad.13@2549.21,1938.98 2557.09,1938.98 2896.48,2278.37 3034.28,2278.37 3174.89,2418.98 pad.13@3188.98,2448.82
BUZZER_RET: D9.2 J10.1 Q7.3 | length 1177.7
  Top Layer w10: Q7.3 3700.79,2811.02 3700.79,2952.76 3798.03,3050 4009.61,3050 4074.8,3115.2 ; D9.2 4074.8,3115.2 ; J10.1 4110.63,3079.37 4074.8,3115.2
CAN_N: J6.5 pad.13@1899.61,1131.89 pad.13@2194.88,1968.5 PB1.19 | length 2092.8
  Top Layer w10: pad.13@2194.88,1968.5 2338.5,1968.5 2350.71,1980.71 2350.71,2047.65 2350.11,2048.25 PB1.19@2350.11,2055.28
  Top Layer w15: J6.5 1401.57,1106.3 1488.19,1192.91 1507.95,1192.91 1615.63,1085.24 1765.16,1085.24 1882.25,968.15 1932.71,968.15 1968.5,1003.94 1968.5,1102.36 1938.98,1131.89 pad.13@1899.61,1131.89
  Bottom Layer w15: pad.13@1899.61,1131.89 2194.88,1427.17 pad.13@2194.88,1968.5
CAN_P: J6.4 pad.13@1897.64,1043.31 pad.13@2244.09,2017.72 PB1.17 | length 2134.9
  Top Layer w15: J6.4@1303.15,1098.43 J6.4 1295.28,1248.03 1338.58,1291.34 1444.88,1291.34 1625.98,1110.24 1830.71,1110.24 pad.13@1897.64,1043.31 ; pad.13@2244.09,2017.72 2270.81,1991 2318.17,1991 2330.43,2003.27 2330.43,2005
  Bottom Layer w15: pad.13@1897.64,1043.31 1960.63,1043.31 2244.09,1326.77 pad.13@2244.09,2017.72
CS_HV: D4.4 pad.14 pad.15 Q3.3 R8.1 R17.1 | length 958.1
  Top Layer w10: R8.1 3007.83,3349.88 3102.24,3444.29 Q3.3 3165.35,3504.65 3310.35,3504.65 pad.14 ; D4.4 3250.75,3160.2 R17.1 3263.78,3173.23 pad.15
  Bottom Layer w10: pad.14 3360,3175.43 pad.15 pad.15@3366.14,3177.17
CS_LV: pad.7@3090.55,3267.72 pad.13@3041.34,2460.63 PB1.59 Q3.2 R7.1 TP1.1 | length 1617
  Top Layer w10: PB1.59 2744.09,2145.67 TP1.1 2992.13,2393.7 2992.13,2411.42 pad.13@3041.34,2460.63 ; pad.7@3090.55,3267.72 3142.4,3319.57 Q3.2 3224.17,3355.71 R7.1
  Bottom Layer w10: pad.13@3041.34,2460.63 3041.34,2509.84 3145.67,2614.17 3145.67,3189.37 3090.55,3244.49 pad.7@3090.55,3267.72
DATA_HV: D4.5 Q1.3 R4.1 R16.1 | length 1047.5
  Top Layer w10: R16.1 3084.57,3173.23 D4.5 3163.83,3226.43 3720.82,3226.43 3727.26,3219.99 3727.26,3180 R4.1 3705.71,3269.29 Q1.3
DATA_LV: pad.7@3348.54,2840.12 pad.7@3592.52,2982.28 PB1.51 Q1.2 R3.1 TP2.1 | length 2447.6
  Top Layer w10: PB1.51 2665.35,2137.8 TP2.1 2680.85,2523.37 2892.5,2523.37 3010.86,2641.73 3150.16,2641.73 pad.7@3348.54,2840.12 ; pad.7@3330.23,2857.77 pad.7@3330.71,2858.27 ; pad.7@3592.52,2988.19 3608.27,2972.44 3688.98,2972.44 3854.33,3137.8 3854.33,3297.36 Q1.2 3795.12,3358.23 R3.1
  Bottom Layer w10: pad.7@3330.71,2858.27 3344.49,2844.49 3446.85,2844.49 pad.7@3590.55,2988.19
EM_ENABLE: D7.4 PB1.29 R23.1 | length 1790.1
  Top Layer w10: D7.4@817.56,1843.11 D7.4 819.99,1838.15 865.39,1883.55 865.39,1890.94 899.65,1925.2 R23.1 1212.6,1925.2 1228.35,1909.45 2344.45,1909.45 2395.38,1960.38 2432.98,1960.38 2433.23,1960.63 2448.82,1960.63 PB1.29
EM_LED: pad.4 pad.5 pad.13@1879.92,2175.2 PB1.49 Q5.1 R14.2 | length 2457
  Top Layer w10: Q5.1 451.77,1830.71 R14.2 600.71,1830.71 650.75,1880.75 pad.4 ; pad.13@1879.92,2175.2 1909.45,2204.72 2488.19,2204.72 2590.55,2102.36 2641.73,2102.36 2645.67,2098.43 PB1.49
  Bottom Layer w10: pad.4 996.06,1877.95 pad.5 1763.78,2059.06 pad.13@1879.92,2175.2
EM_LED_RET: J4.3 Q5.3 | length 853.7
  Top Layer w10: J4.3 22.52,2422.48 40,2405 40,2097.37 236.78,1900.59 330.71,1900.59 Q5.3
GND: C1.2 C2.2 C3.2 C4.2 D1.2 D2.2 D4.2 D5.2 D6.2 D7.2 D8.2 J1.1 J2.2 J3.1 J4.2 J5.1 J6.3 J6.6 J6.7 J6.8 J6.9 J7.2 J8.1 J9.2 J11.6 P2.1 pad.7@265.75,1555.12 pad.7@659.45,1663.39 pad.7@679.13,1525.59 pad.7@816.93,1535.43 pad.7@974.41,1505.91 pad.7@1053.15,1446.85 pad.13@3100.39,2086.61 pad.13@3228.35,2017.72 pad.13@3267.72,1791.34 pad.13@3307.09,1968.5 pad.26 pad.27 pad.28 pad.29 PB1.2 PB1.4 PB1.6 PB1.8 PB1.10 PB1.12 Q4.2 Q5.2 Q6.2 Q7.2 Q8.2 R10.1 R13.1 R14.1 R15.1 R35.1 U1.2 U2.2 | length 3084.7
  Top Layer w10: D7.2 1069.25,1800.75 pad.28 ; pad.7@974.41,1505.91 994.09,1505.91 pad.7@1053.15,1446.85 ; D4.2@3135,3048.18 D4.2
  Bottom Layer w10: pad.7@265.75,1555.12 649.61,1555.12 679.13,1525.59 757.87,1446.85 915.35,1446.85 974.41,1505.91 944.88,1535.43 816.93,1535.43 816.93,1633.07 776.77,1673.23 669.29,1673.23 pad.7@659.45,1663.39 ; pad.7@1053.15,1446.85 1151.57,1446.85 J6.3 ; pad.28 1145,1785 1265,1905 1345,1905 pad.29 ; pad.13@3100.39,2086.61 3159.45,2086.61 pad.13@3228.35,2017.72 ; pad.27 pad.26 ; pad.13@3267.72,1791.34 3307.09,1830.71 pad.13@3307.09,1968.5
HV_ENABLE: D7.5 pad.18 pad.19 PB1.27 R22.1 | length 2043.3
  Top Layer w10: pad.19 768.15,1763.35 D7.5 817.68,1758.27 R22.1 ; pad.18 1299.21,1976.38 1311.02,1976.38 1361.95,1925.45 2335.45,1925.45 2386.38,1976.38 2426.35,1976.38 2426.35,2036.59 PB1.27
  Bottom Layer w10: pad.19 826.52,1861.95 1184.79,1861.95 pad.18
HV_LED: pad.2 pad.3 pad.13@1952.76,2145.67 PB1.47 Q4.1 R13.2 | length 2576.4
  Top Layer w10: Q4.1 382.87,1685.04 R13.2 600.71,1685.04 654.69,1739.02 pad.2 ; pad.13@1952.76,2145.67 1982.28,2175.2 2490.16,2175.2 2584.47,2080.88 2623.2,2080.88 2623.2,2042.15 PB1.47
  Bottom Layer w10: pad.2 pad.3 1539.37,1732.28 pad.13@1952.76,2145.67
HV_LED_RET: J2.3 Q4.3 | length 584.9
  Top Layer w10: J2.3 124.76,1776.81 209.96,1691.61 287.4,1614.17 Q4.3
LOW_BAT_LED: pad.13@1299.21,2588.58 pad.13@2362.2,1820.87 PB1.26 Q6.1 R15.2 | length 1901.3
  Top Layer w10: R15.2 1095,2803.31 Q6.1 1197.6,2680.35 1289.37,2588.58 pad.13@1299.21,2588.58 ; pad.13@2362.2,1820.87 2387.45,1820.87 2419.29,1789.03 PB1.26
  Bottom Layer w10: pad.13@1299.21,2588.58 1505.91,2381.89 1931.03,2381.89 2220.16,2092.76 2230.65,2090.25 2249.66,2090.25 2249.71,2090.3 2362.2,1977.81 pad.13@2362.2,1820.87
NetD1_1: D1.1 R1.1 | length 118.9
  Top Layer w10: R1.1 1252.95,2186.02 D1.1
NetD2_1: D2.1 R2.1 | length 115.5
  Top Layer w10: D2.1 1629.33,2186.02 R2.1
NetD3_2: D3.2 R11.2 | length 116.6
  Top Layer w10: R11.2 1466.22,2810.12 D3.2
NetJ2_4: J2.4 pad.6 pad.7@751.97,1590.55 R22.2 | length 1161
  Top Layer w10: J2.4 93.27,1855.55 pad.6 ; pad.7@751.97,1590.55 858.27,1590.55 933.19,1665.47 R22.2
  Bottom Layer w10: pad.6 358.27,1590.55 pad.7@751.97,1590.55
NetJ3_2: J3.2 R20.1 | length 913.4
  Top Layer w10: R20.1 3672.99,1695.63 3805.12,1827.76 J3.2@4468.5,1827.76
NetJ3_3: J3.3 R21.2 | length 962.2
  Top Layer w10: R21.2@3639.65,1570.87 R21.2 3687.24,1600.63 3835.63,1749.02 J3.3@4468.5,1749.02
NetJ3_4: J3.4 R18.2 | length 995.2
  Top Layer w10: R18.2 3640.63,1340.63 3970.28,1670.28 J3.4@4468.5,1670.28
NetJ3_5: J3.5 R19.2 | length 1124.3
  Top Layer w10: R19.2@3624.65,1250.63 R19.2 3615.16,1255.91 3669.29,1255.91 3669.29,1346.46 3921.26,1598.43 4425.2,1598.43 4432.09,1591.54 4511.06,1591.54 J3.5
NetJ4_4: J4.4 R23.2 | length 1351.8
  Top Layer w10: J4.4 18.78,2501.22 65,2455 65,2095 90,2070 674.09,2070 R23.2
NetJ5_2: J5.2 R27.2 | length 1846.6
  Top Layer w10: R27.2 3780,945.83 3780,1380 3915,1515 4370,1515 4411,1474 4411,1144 4424.09,1130.91 J5.2
NetJ5_3: J5.3 R26.1 | length 2012.2
  Top Layer w10: R26.1 3686.97,666.97 3805,785 3805,1365 3925,1485 4365,1485 4395,1455 4395,1065 4407.83,1052.17 J5.3
NetJ5_4: J5.4 R24.2 | length 1408.4
  Top Layer w10: R24.2 4234.76,389.76 4395,550 4395,960 4408.43,973.43 J5.4
NetJ5_5: J5.5 R25.1 | length 1360
  Top Layer w10: R25.1@3596.18,296.97 R25.1 3649.17,355 4235,355 4420,540 4420,850 4464.69,894.69 J5.5
NetJ7_1: J7.1 R29.2 | length 510
  Top Layer w10: J7.1 -70.83,685 25,685 55,655 55,500 105,450 R29.2
NetJ8_2: J8.2 R32.1 | length 2042
  Top Layer w10: R32.1 3602.01,2244.45 3614.17,2232.28 3677.17,2232.28 3865,2420.12 3865,2985 3905,3025 4385,3025 4425,2985 4425,2550 4430.71,2544.29 J8.2
NetJ8_3: J8.3 R33.2 | length 2118.5
  Top Layer w10: R33.2 3688.27,2163.27 3895,2370 3895,2975 3920,3000 4375,3000 4400,2975 4400,2495 4429.45,2465.55 J8.3
NetJ8_4: J8.4 R28.2 | length 1263.3
  Top Layer w10: R28.2 3888.27,1913.27 4045,2070 4380,2070 4395,2085 4395,2345 4436.81,2386.81 J8.4
NetJ8_5: J8.5 R31.1 | length 1244.4
  Top Layer w10: R31.1 3658.86,1870 4202.63,1870 4411,2078.37 4411,2291 4428.07,2308.07 J8.5
NetJ9_1: J9.1 R30.1 | length 448.3
  Top Layer w10: J9.1 -3.58,1161.42 35,1200 35,1455.12 R30.1
NetJ11_4: J11.4 R17.2 | length 620.2
  Top Layer w10: J11.4 2912.18,2700.37 2912.18,2779.36 2909.45,2782.09 3154.5,3027.15 3188.77,3027.15 3195.21,3033.59 3195.21,3059.06 R17.2
NetJ11_7: J11.7 R12.2 | length 400
  Top Layer w10: J11.7 2905.51,2993.7 R12.2
NetJ11_8: J11.8 R16.2 | length 539.2
  Top Layer w10: J11.8 2731.13,2719.31 2731.13,2790.18 3000,3059.06 R16.2
NetJ12_2: "AMS LED.2" R34.2 | length 630.1
  Top Layer w10: R34.2 4039.17,79.17 4387.17,427.17 4460.63,427.17
NetQ6_3: Q6.3 R11.1 | length 157
  Top Layer w10: Q6.3 1265.59,2789.29 R11.1
NetQ8_3: Q8.3 R34.1 | length 126.7
  Top Layer w10: Q8.3 3970.59,193.46 R34.1
PWR_POS1: D5.3 pad.13@2312.99,1633.86 pad.13@3275.59,1289.37 PB1.16 R18.1 | length 1571.6
  Top Layer w10: pad.13@2312.99,1633.86 2320.87,1641.73 PB1.16 ; pad.13@3275.59,1289.37 3448.39,1289.37 R18.1 3499.65,1428.15 D5.3
  Bottom Layer w10: pad.13@2312.99,1633.86 2312.99,1596.46 2620.08,1289.37 pad.13@3275.59,1289.37
PWR_POS2: D5.4 pad.13@2391.73,1584.65 pad.13@3669.29,1429.13 PB1.18 R19.1 | length 1883.5
  Top Layer w10: PB1.18 2340.55,1685.04 2391.73,1633.86 pad.13@2391.73,1584.65 ; R19.1@3503.94,1259.84 3567.39,1323.29 3567.39,1380.62 3573.83,1387.06 3583.91,1387.06 3599.96,1403.11 D5.4 3600.87,1429.13 pad.13@3669.29,1429.13
  Bottom Layer w10: pad.13@2391.73,1584.65 2401.57,1574.8 2401.57,1547.24 2594.49,1354.33 3248.03,1354.33 3255.91,1362.2 3605.56,1362.2 3653.67,1413.52 pad.13@3669.29,1429.13
PWR_POS3: D5.5 pad.13@2450.79,1633.86 pad.13@3710.63,1525.59 PB1.20 R20.2 | length 2002.1
  Top Layer w10: PB1.20 2363.02,1739.35 2363.02,1702.92 2373.52,1692.42 2398.2,1667.73 2414.94,1667.73 2448.82,1633.86 pad.13@2450.79,1633.86 ; R20.2 3499.65,1647.06 3535.7,1647.06 3542.14,1640.62 3542.14,1560.85 D5.5 3622.52,1525.59 pad.13@3710.63,1525.59
  Bottom Layer w10: pad.13@2450.79,1633.86 2452.76,1631.89 2452.76,1547.24 2614.17,1385.83 3547.24,1385.83 3661.42,1500 3685.04,1500 pad.13@3710.63,1525.59
PWR_POS4: D5.1 pad.13@2495,1575 pad.13@3271.65,1500 PB1.22 R21.1 | length 1419.5
  Top Layer w10: PB1.22 2379.92,1708.64 2380.15,1708.42 2404.83,1683.73 2421.57,1683.73 2430.3,1675 2485,1675 2508.07,1651.93 2508.07,1576.57 pad.13@2495,1575 ; pad.13@3271.65,1500 3496.54,1500 D5.1 3499.65,1503.11 R21.1
  Bottom Layer w10: pad.13@2495,1575 2559.06,1525.59 2559.06,1500 pad.13@3271.65,1500
SCROLL_DOWN: D7.3 pad.16 pad.17 PB1.33 R30.2 | length 2750.8
  Top Layer w10: R30.2 562.99,1500 704.72,1641.73 704.72,1826.77 774.96,1826.77 786.39,1815.34 838.81,1815.34 861.62,1838.15 D7.3 920.43,1830.71 pad.17 ; pad.16@1409.45,1795.28 1484.25,1870.08 2356.27,1870.08 2405.49,1919.29 2488.19,1919.29 PB1.33
  Bottom Layer w10: pad.17 1374.02,1830.71 pad.16
SCROLL_UP: D7.1 PB1.31 R29.1 | length 3428.9
  Top Layer w10: R29.1 500,450 700,650 700,1325.98 992.13,1618.11 992.13,1710 ; D7.1 984.69,1763.35 992.13,1755.91 992.13,1710 ; PB1.31 2468.5,1940.95 2403.54,1940.95 2352.36,1889.76 1413.39,1889.76 1300.84,1777.22 1171.99,1777.22 1084.77,1690 1012.13,1690 992.13,1710
TRAC_POS1: D8.3 pad.13@3198.82,1830.71 pad.13@3200.79,1917.32 PB1.38 R28.1 | length 1184.1
  Top Layer w10: PB1.38 2540.18,1744.91 2540.18,1778.39 2545.43,1783.64 2944.71,1783.64 3015.4,1854.33 3188.98,1854.33 pad.13@3200.79,1842.52 ; pad.13@3200.79,1917.32 3487.83,1917.32 3491.69,1913.46 D8.3
  Bottom Layer w10: pad.13@3200.79,1842.52 pad.13@3200.79,1917.32
TRAC_POS2: D8.4 PB1.36 R31.2 | length 1321.2
  Top Layer w10: PB1.36 2520.5,1744.91 2520.5,1781.33 2613.35,1874.19 2869.96,1874.19 2870.64,1873.51 3001.44,1873.51 3002.12,1874.19 3277.66,1874.19 3338.58,1813.27 R31.2 3491.89,1866.83 3527.94,1866.83 3534.39,1873.28 3534.39,1938.17 D8.4
TRAC_POS3: D8.5 pad.13@3283.46,2106.3 pad.13@3661.42,2055.12 PB1.34 R32.2 | length 1659
  Top Layer w10: PB1.34 2498.03,1781.5 2606.72,1890.19 2876.59,1890.19 2877.27,1889.51 2994.82,1889.51 3207.67,2102.36 3279.53,2102.36 pad.13@3283.46,2106.3 ; R32.2 3559.51,2185.53 3559.51,2123.28 3592.09,2090.7 D8.5 3645.87,2070.67 pad.13@3661.42,2055.12
  Bottom Layer w10: pad.13@3283.46,2106.3 3610.24,2106.3 pad.13@3661.42,2055.12
TRAC_POS4: D8.1 PB1.32 R33.1 | length 1308.5
  Top Layer w10: PB1.32 2478.35,1789.37 2595.17,1906.19 2883.22,1906.19 2883.9,1905.51 2988.19,1905.51 3245.87,2163.19 3491.69,2163.19 D8.1
USART_RX: P2.3 PB1.60 | length 417.7
  Top Layer w10: PB1.60 2756.72,1742.13 2756.72,1700.61 2823.45,1700.61 2823.63,1700.79 3035.43,1700.79 P2.3
USART_TX: P2.2 PB1.58 | length 423.3
  Top Layer w10: PB1.58 2737.03,1739.35 2737.03,1697.67 2766.99,1667.72 P2.2
VCAN: C3.1 J6.2 U2.1 | length 927.4
  Top Layer w10: J6.2 1492.13,901.57 1421.18,830.63 1421.18,700.71 1401.38,680.91 1401.38,558.31 U2.1 1362.09,464.29 C3.1
WR_HV: D4.1 Q2.3 R6.1 R12.1 | length 916.2
  Top Layer w10: R6.1 2501.85,3350.39 2679.01,3173.23 R12.1 2953.57,3173.23 2953.57,3137.18 2960.01,3130.73 3026.67,3130.73 D4.1
WR_LV: pad.7@2687.01,3415.35 pad.13@2735,2465 PB1.55 Q2.2 R5.1 TP3.1 | length 1637.4
  Top Layer w10: R5.1 2510.98,3470 Q2.2 2631.69,3405.51 pad.7@2661.42,3405.51 ; PB1.55 TP3.1 2731.13,2353.17 2731.13,2461.13 pad.13@2735,2465
  Bottom Layer w10: pad.7@2687.01,3415.35 2687.01,3379.92 2740.16,3326.77 2740.16,2785.66 2731.13,2776.63 2731.13,2468.87 pad.13@2735,2465
pads on no net: "AMS LED.0" D4.3 J1.0 J2.0 J3.0 J4.0 J5.0 J6.1 J7.0 J8.0 J9.0 J10.0 J11.1 J11.3 J11.5 J11.9 J11.10 PB1.0 PB1.14 PB1.15 PB1.21 PB1.23 PB1.24 PB1.25 PB1.35 PB1.37 PB1.39 PB1.41 PB1.43 PB1.45 PB1.48 PB1.50 PB1.52 PB1.53 PB1.54 PB1.56 PB1.57 PB1.61 PB1.62 PB1.63 PB1.64 PB1.65 PB1.66 PB1.67

## Polygon pours and split planes (outlines as drawn)
GND on Top Layer "Ground Plane" (solid, remove dead copper, pour order 24): -450,3215 -445,3210 -445,290 -195,40 645,40 720,115 740,95 3585,95 3585,80 3625,40 4625,40 4895,310 4895,3230 4605,3520 -165,3520

## Keep-outs
Keep-Out Layer:
  circle w10: c4280,131 r80
  circle w10: c150,3430 r80
  circle w10: c4280,3430 r80
  circle w10: c150,131 r80
  lines w10: 86,565 86,1445 ; 86,565 506,565 ; 86,565 506,565 ; 86,565 86,1445 ; 86,1445 506,1445 ; 86,1445 506,1445 ; 86,2097 86,2977 ; 86,2097 506,2097 ; 86,2097 506,2097 ; 86,2097 86,2977 ; 86,2977 506,2977 ; 86,2977 506,2977 ; 506,565 506,1445 ; 506,565 506,1445 ; 506,2097 506,2977 ; 506,2097 506,2977 ; -492.13,275.59 -226.54,10 655.67,10 705.67,60 2910.79,60 3546.3,60 3596.3,10 4655.67,10 4921.26,275.59 4921.26,3251.97 4633.23,3540 -200.16,3540 -492.13,3248.03 -492.13,275.59 ; 3955,565 3955,1445 4375,1445 4375,565 3955,565 ; 3955,2097 3955,2977 4375,2977 4375,2097 3955,2097

## Silkscreen, mask and mechanical layers (free items; w line width, h text height)
Top Overlay:
  drawing of 1116 lines, arcs and shapes, not listed
  text "Buzzer" at 4555,3255 h30
  text "12V Power" at -358.27,3153.54 h30
  text "BUZ_RET" at 4230,3070 h30
  text "BUZ_12V" at 4230,3000 h30
  text "12V" at 1,2974 h25
  text "Screen Connector" at 2590.55,2905.51 h30
  text "GND" at 1,2892 h25
  text "Selector Switch" at 4480,2790 h30
  text "EM Enable" at -354.33,2673.23 h30
  text "GND" at 3845,2605 h30
  text "Low Battery" at 1370,2520 h30
  text "EN" at 535,2492 h30
  text "LED_RET" at 534,2405 h30
  text "GND" at 534,2323 h30
  text "Data LV" at 2196.85,2295.28 h30
  text "CS LV" at 3000,2291.34 h30
  text "LED_PWR" at 530,2240 h30
  text "Write LV" at 2618.11,2212.6 h30
  text "5V" at 1335.43,2074.92 h30
  text "3.3V" at 1460.43,2074.92 h30
  text "Selector Switch" at 4480,2070 h30
  text "HV Enable" at -354.33,2027.56 h30
  text "GND" at 4335,1890 h30
  text "EN" at 19.68,1870.08 h30
  text "E17-02-DCU" at 1086.61,1854.33 h75
  text "Raj Mody" at 1503.94,1783.46 h30
  text "LED_RET" at 19.68,1761.81 h30
  text "GND" at 19.68,1683.07 h30
  text "LED_PWR" at 19.68,1555.12 h30
  text "Scroll Down" at -360,1410 h30
  text "Selector Switch" at 4480,1370 h30
  text "GND" at 3851,1186 h30
  text "Scroll Up" at -350,950 h30
  text "CAN Connector" at 1200.79,822.83 h30
  text "5V" at 4376,486 h30
  text "RET" at 4346,411 h30
Mechanical 2:
  lines w10: -492.13,275.59 -492.13,275.59 ; 4921.26,275.59 4921.26,275.59